# Allegro board base.brd
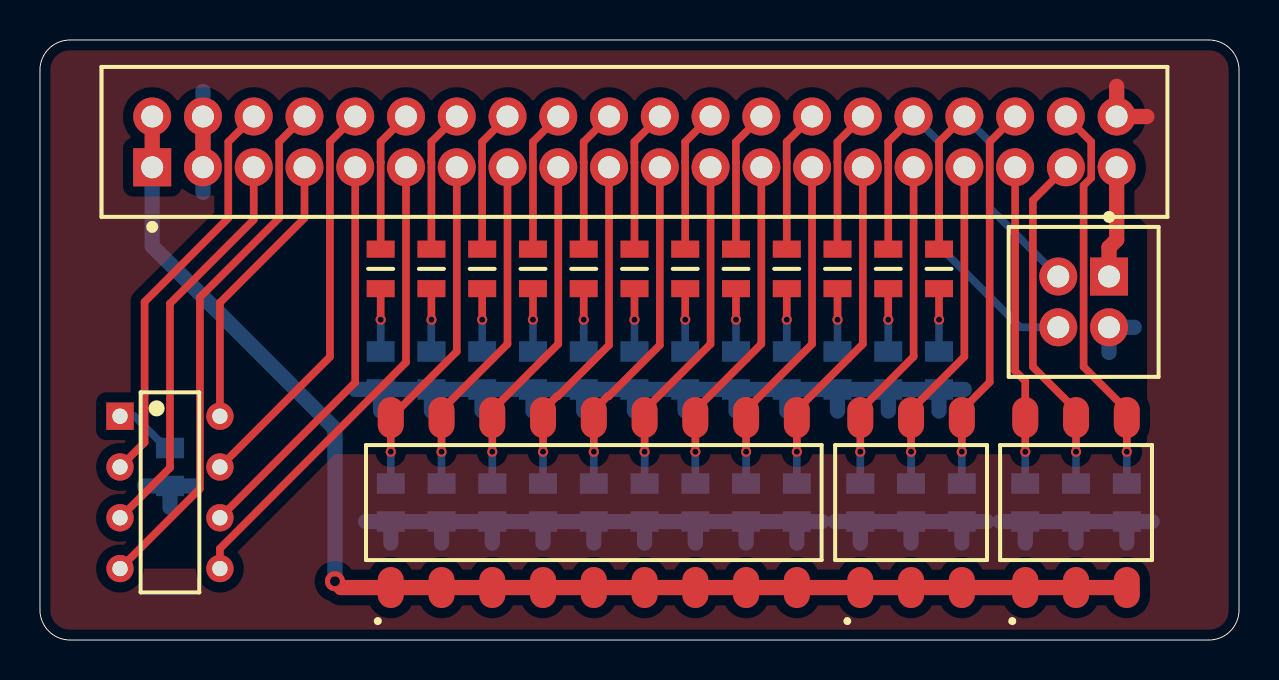
[diagram p0: board, top side]
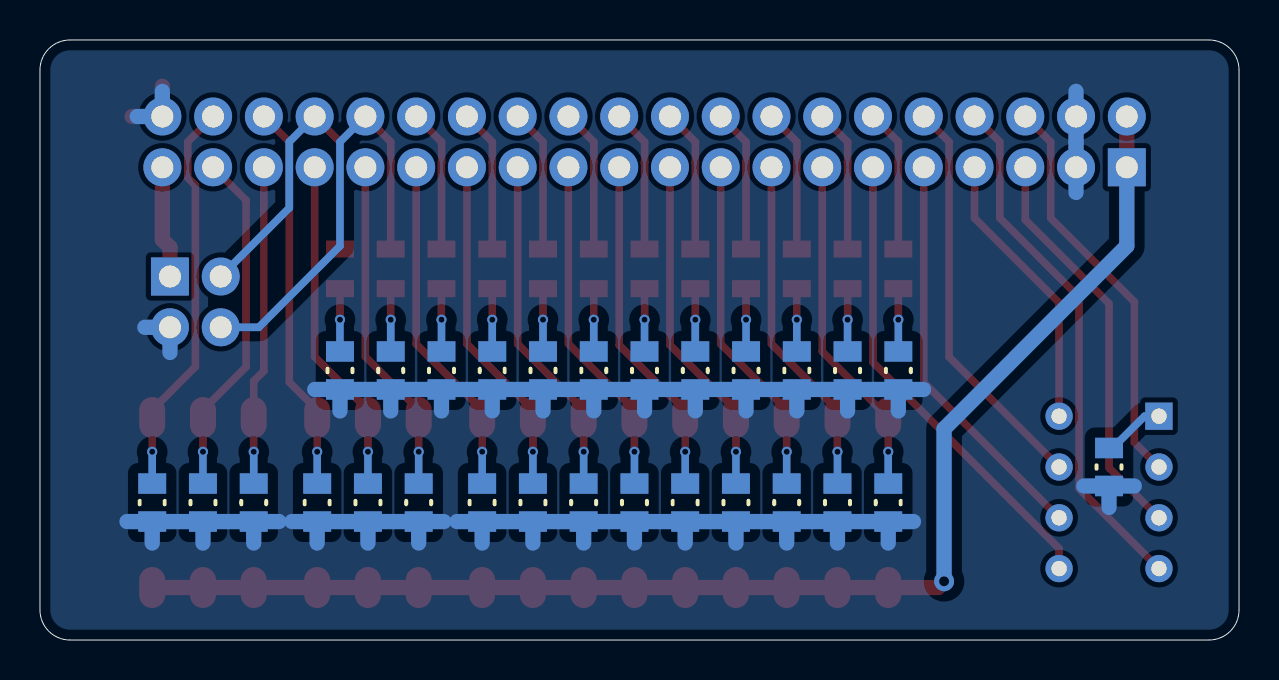
[diagram p1: board, bottom side, seen from below]

Outline 60 x 30 mm; copper layers: TOP, BOTTOM. Coordinates in mm from the lower left corner of the outline.
Outline path: 0,28.5 0,1.5 arc(0.44,0.44) 1.5,0 58.5,0 arc(59.56,0.44) 60,1.5 60,28.5 arc(59.56,29.56) 58.5,30 1.5,30 arc(0.44,29.56) 0,28.5

## Design rules (mm)
constraint set DEFAULT: min track width 0.381
net group PWR: nets VCC VCCIO

## Placement (name value [footprint] x y rotation side)
D1  F5F1  [DIO0805]  17.05 18.56 90 top
D2  F5F1  [DIO0805]  19.59 18.56 90 top
D3  F5F1  [DIO0805]  22.13 18.56 90 top
D4  F5F1  [DIO0805]  24.67 18.56 90 top
D5  F5F1  [DIO0805]  27.21 18.56 90 top
D6  F5F1  [DIO0805]  29.75 18.56 90 top
D7  F5F1  [DIO0805]  32.29 18.56 90 top
D8  F5F1  [DIO0805]  34.83 18.56 90 top
D9  F5F1  [DIO0805]  37.37 18.56 90 top
D10  F5F1  [DIO0805]  39.91 18.56 90 top
D11  F5F1  [DIO0805]  42.45 18.56 90 top
D12  F5F1  [DIO0805]  44.99 18.56 90 top
R1  1k  [RES0805]  17.55 6.87 270 bottom
R2  1k  [RES0805]  20.09 6.87 270 bottom
R3  1k  [RES0805]  22.63 6.87 270 bottom
R4  1k  [RES0805]  25.17 6.87 270 bottom
R5  1k  [RES0805]  27.71 6.87 270 bottom
R6  1k  [RES0805]  30.25 6.87 270 bottom
R7  1k  [RES0805]  32.79 6.87 270 bottom
R8  1k  [RES0805]  35.33 6.87 270 bottom
R9  1k  [RES0805]  37.87 6.87 270 bottom
R10  1k  [RES0805]  41.05 6.87 270 bottom
R11  1k  [RES0805]  43.59 6.87 270 bottom
R12  1k  [RES0805]  46.13 6.87 270 bottom
R13  1k  [RES0805]  49.3 6.87 270 bottom
R14  1k  [RES0805]  51.84 6.87 270 bottom
R15  1k  [RES0805]  54.38 6.87 270 bottom
R16  330  [RES0805]  17.05 13.48 270 bottom
R17  330  [RES0805]  19.59 13.48 270 bottom
R18  330  [RES0805]  22.13 13.48 270 bottom
R19  330  [RES0805]  24.67 13.48 270 bottom
R20  330  [RES0805]  27.21 13.48 270 bottom
R21  330  [RES0805]  29.75 13.48 270 bottom
R22  330  [RES0805]  32.29 13.48 270 bottom
R23  330  [RES0805]  34.83 13.48 270 bottom
R24  330  [RES0805]  37.37 13.48 270 bottom
R25  330  [RES0805]  39.91 13.48 270 bottom
R26  330  [RES0805]  42.45 13.48 270 bottom
R27  330  [RES0805]  44.99 13.48 270 bottom
R28  510  [RES0805]  6.5 8.65 90 bottom
U1  keyarray9  [KEYARRAY9]  27.71 6.87 90 top
U2  keyarray3  [KEYARRAY3]  43.59 6.87 90 top
U3  keyarray3  [KEYARRAY3]  51.84 6.87 90 top
U4  digitaltub  [DIGITALTUB]  6.5 7.38 0 top
U5  PORT  [PIN40]  5.62 23.64 0 top
U6  -  [PIN4]  53.49 18.18 180 top

## Library data of the parts
D1-D12 = F5F1
R1-R28 = R
U1 = keyarray9
U2 U3 = keyarray3
U4 = digitaltub
U5 = PORT
U6 = PIN4

## Footprints (pads in the part's own frame, mm; a bottom-side part is the same pattern mirrored in y, then rotated)
DIGITALTUB
  rect 1.367x1.367 hole 0.765: 1(-2.499,3.81)
  round 1.367 hole 0.765: 2(-2.499,1.27) 3(-2.499,-1.27) 4(-2.499,-3.81) 5(2.499,-3.81) 6(2.499,-1.27) 7(2.499,1.27) 8(2.499,3.81)
DIO0805
  rect 0.851x1.4 smd: 1(-0.988,0) 2(0.988,0)
KEYARRAY3
  oval 2.05x1.3 smd: 1(-4.249,2.54) 2(-4.249,0) 3(-4.249,-2.54) 4(4.249,-2.54) 5(4.249,0) 6(4.249,2.54)
KEYARRAY9
  oval 2.05x1.3 smd: 1(-4.249,10.16) 2(-4.249,7.62) 3(-4.249,5.08) 4(-4.249,2.54) 5(-4.249,0) 6(-4.249,-2.54) 7(-4.249,-5.08) 8(-4.249,-7.62) 9(-4.249,-10.16) 10(4.249,-10.16) 11(4.249,-7.62) 12(4.249,-5.08) 13(4.249,-2.54) 14(4.249,0) 15(4.249,2.54) 16(4.249,5.08) 17(4.249,7.62) 18(4.249,10.16)
PIN4
  rect 1.9x1.9 hole 1.1: 1(0,0)
  round 1.9 hole 1.1: 2(0,2.54) 3(2.54,0) 4(2.54,2.54)
PIN40
  rect 1.9x1.9 hole 1.1: 1(0,0)
  round 1.9 hole 1.1: 2(0,2.54) 3(2.54,0) 4(2.54,2.54) 5(5.08,0) 6(5.08,2.54) 7(7.62,0) 8(7.62,2.54) 9(10.16,0) 10(10.16,2.54) 11(12.7,0) 12(12.7,2.54) 13(15.24,0) 14(15.24,2.54) 15(17.78,0) 16(17.78,2.54) 17(20.32,0) 18(20.32,2.54) 19(22.86,0) 20(22.86,2.54) 21(25.4,0) 22(25.4,2.54) 23(27.94,0) 24(27.94,2.54) 25(30.48,0) 26(30.48,2.54) 27(33.02,0) 28(33.02,2.54) 29(35.56,0) 30(35.56,2.54) 31(38.1,0) 32(38.1,2.54) 33(40.64,0) 34(40.64,2.54) 35(43.18,0) 36(43.18,2.54) 37(45.72,0) 38(45.72,2.54) 39(48.26,0) 40(48.26,2.54)
RES0805
  rect 1.026x1.4 smd: 1(-0.95,0) 2(0.95,0)

## Nets
GND: R1.2 R2.2 R3.2 R4.2 R5.2 R6.2 R7.2 R8.2 R9.2 R10.2 R11.2 R12.2 R13.2 R14.2 R15.2 R16.2 R17.2 R18.2 R19.2 R20.2 R21.2 R22.2 R23.2 R24.2 R25.2 R26.2 R27.2 R28.1 U5.3 U5.4 U5.40 U6.2
VCC: U5.39 U6.1
VCCIO: U1.1 U1.2 U1.3 U1.4 U1.5 U1.6 U1.7 U1.8 U1.9 U2.1 U2.2 U2.3 U3.1 U3.2 U3.3 U5.1 U5.2
DA: U4.8 U5.7
DB: U4.7 U5.10
DC: U4.6 U5.9
DD: U4.5 U5.11
DE: U4.4 U5.8
DF: U4.2 U5.6
DG: U4.3(G) U5.5
K1: R1.1 U1.18 U5.13
K2: R2.1 U1.17 U5.15
K3: R3.1 U1.16 U5.17
K4: R4.1 U1.15 U5.19
K5: R5.1 U1.14 U5.21
K6: R6.1 U1.13 U5.23
K7: R7.1 U1.12 U5.25
K8: R8.1 U1.11 U5.27
K9: R9.1 U1.10 U5.29
K10: R10.1 U2.6 U5.31
K11: R11.1 U2.5 U5.33
K12: R12.1 U2.4 U5.36
K13: R13.1 U3.6 U5.35
K14: R14.1 U3.5 U5.37
K15: R15.1 U3.4 U5.38
L1: D1.2 U5.12
L2: D2.2 U5.14
L3: D3.2 U5.16
L4: D4.2 U5.18
L5: D5.2 U5.20
L6: D6.2 U5.22
L7: D7.2 U5.24
L8: D8.2 U5.26
L9: D9.2 U5.28
L10: D10.2 U5.30
L11: D11.2 U5.32 U6.4
L12: D12.2 U5.34 U6.3
N04054: R28.2 U4.1
N04979: D1.1(CATHODE) R16.1
N05029: D2.1(CATHODE) R17.1
N05079: D3.1(CATHODE) R18.1
N05129: D4.1(CATHODE) R19.1
N05179: D5.1(CATHODE) R20.1
N05229: D6.1(CATHODE) R21.1
N05279: D7.1(CATHODE) R22.1
N05329: D8.1(CATHODE) R23.1
N05379: D9.1(CATHODE) R24.1
N09942: D10.1(CATHODE) R25.1
N09976: D11.1(CATHODE) R26.1
N12519: D12.1(CATHODE) R27.1

## Via types
v1: diameter 0.508, hole 0.305, TOP to BOTTOM, 27 vias
v2: diameter 1.001, hole 0.5, TOP to BOTTOM, 1 via

## Routing (per net, layer and track width the routed paths; a pad name or vN(x,y) marks a point on that pad's centre or on a via; arc(x,y) is an arc through that point)
GND: length 116.4
  TOP w0.762: 53.88,27.69 U5.40 55.39,26.18 ; U5.4 U5.3
  BOTTOM w0.762: 25.95,12.53 R20.2 ; R20.2 27.21,11.45 ; R20.2 28.47,12.53 ; 17.55,4.85 R1.2 ; R1.2 18.82,5.92 ; R1.2 16.29,5.92 ; 32.29,11.45 R22.2 ; R22.2 31.03,12.53 ; R22.2 33.55,12.53 ; R25.2 41.17,12.53 ; R25.2 38.65,12.53 ; R25.2 39.91,11.45 ; 20.09,4.85 R2.2 ; R2.2 18.83,5.92 ; R2.2 21.36,5.92 ; 8.16,24.89 U5.3 8.16,22.38 ; R17.2 20.85,12.53 ; R17.2 18.33,12.53 ; R17.2 19.59,11.45 ; 5.24,7.7 R28.1 ; R28.1 6.5,6.63 ; R28.1 7.77,7.7 ; R8.2 36.6,5.92 ; R8.2 35.33,4.85 ; R8.2 34.07,5.92 ; 43.73,12.53 R27.2 ; R27.2 46.25,12.53 ; R27.2 44.99,11.45 ; 23.41,12.53 R19.2 ; R19.2 24.67,11.45 ; R19.2 25.93,12.53 ; 33.57,12.53 R23.2 ; R23.2 36.09,12.53 ; R23.2 34.83,11.45 ; 41.05,4.85 R10.2 ; R10.2 39.79,5.92 ; R10.2 42.31,5.92 ; 8.16,27.43 U5.4 8.16,24.92 ; R12.2 47.39,5.92 ; R12.2 44.87,5.92 ; R12.2 46.13,4.85 ; 37.37,11.45 R24.2 ; R24.2 38.63,12.53 ; R24.2 36.11,12.53 ; R11.2 44.85,5.92 ; R11.2 43.59,4.85 ; R11.2 42.33,5.92 ; 53.12,5.92 R15.2 ; R15.2 55.65,5.92 ; R15.2 54.38,4.85 ; 20.87,12.53 R18.2 ; R18.2 23.39,12.53 ; R18.2 22.13,11.45 ; R6.2 31.52,5.92 ; R6.2 30.25,4.85 ; R6.2 28.99,5.92 ; 21.37,5.92 R3.2 ; R3.2 22.63,4.85 ; R3.2 23.9,5.92 ; R13.2 50.57,5.92 ; R13.2 48.04,5.92 ; R13.2 49.3,4.85 ; 25.17,4.85 R4.2 ; R4.2 23.91,5.92 ; R4.2 26.44,5.92 ; R21.2 31.01,12.53 ; R21.2 29.75,11.45 ; R21.2 28.49,12.53 ; 54.75,15.64 53.49,15.64 53.49,14.38 ; R14.2 53.11,5.92 ; R14.2 50.58,5.92 ; R14.2 51.84,4.85 ; 37.87,4.85 R9.2 ; R9.2 39.14,5.92 ; R9.2 36.61,5.92 ; R26.2 43.71,12.53 ; R26.2 41.19,12.53 ; R26.2 42.45,11.45 ; R16.2 18.31,12.53 ; R16.2 15.79,12.53 ; R16.2 17.05,11.45 ; 55.13,26.18 U5.40 53.88,27.43 ; 32.79,4.85 R7.2 ; R7.2 31.53,5.92 ; R7.2 34.06,5.92 ; 26.45,5.92 R5.2 ; R5.2 27.71,4.85 ; R5.2 28.98,5.92
VCC: length 5.6
  TOP w0.762: U5.39 53.88,20.02 53.49,19.63 U6.1
VCCIO: length 66.8
  TOP w0.762: v2(14.76,2.94) 15.07,2.62 U1.1 U1.2 U1.3 U1.4 U1.5 U1.6 U1.7 U1.8 U1.9 U2.1 U2.2 U2.3 U3.1 U3.2 U3.3 ; U5.2 U5.1
  BOTTOM w0.762: U5.1 5.62,19.7 14.76,10.56 v2(14.76,2.94)
DA: length 14.2
  TOP w0.381: U4.8 9,16.87 13.24,21.1 U5.7
DB: length 20.3
  TOP w0.381: U5.10 14.51,24.91 14.51,14.16 U4.7
DC: length 20.3
  TOP w0.381: U4.6 15.78,12.88 U5.9
DD: length 23.9
  TOP w0.381: U4.5 9,4.57 18.32,13.88 U5.11
DE: length 26.4
  TOP w0.381: U4.4 8,7.57 8,17.13 11.97,21.1 11.97,24.91 U5.8
DF: length 20.3
  TOP w0.381: U4.2 5.23,9.88 5.23,16.91 9.42,21.09 9.42,24.9 U5.6
DG: length 20.3
  TOP w0.381: U4.3 6.5,8.61 6.5,16.82 10.7,21.01 U5.5
K1: length 17.2
  TOP w0.381: v1(17.55,9.41) U1.18 20.86,14.42 U5.13
  BOTTOM w0.381: v1(17.55,9.41) R1.1
K2: length 17.2
  TOP w0.381: v1(20.09,9.41) U1.17 20.09,11.5 23.4,14.8 U5.15
  BOTTOM w0.381: v1(20.09,9.41) R2.1
K3: length 17.2
  TOP w0.381: v1(22.63,9.41) U1.16 22.63,11.5 25.94,14.8 U5.17
  BOTTOM w0.381: v1(22.63,9.41) R3.1
K4: length 17.2
  TOP w0.381: U5.19 28.48,14.75 25.92,12.19 25.86,12.19 25.17,11.5 U1.15 v1(25.17,9.41)
  BOTTOM w0.381: v1(25.17,9.41) R4.1
K5: length 17.2
  TOP w0.381: U5.21 31.02,14.74 28.46,12.19 28.4,12.19 27.71,11.5 U1.14 v1(27.71,9.41)
  BOTTOM w0.381: v1(27.71,9.41) R5.1
K6: length 17.2
  TOP w0.381: v1(30.25,9.41) U1.13 30.25,11.5 33.56,14.8 U5.23
  BOTTOM w0.381: v1(30.25,9.41) R6.1
K7: length 17.2
  TOP w0.381: U5.25 36.1,14.8 32.79,11.5 U1.12 v1(32.79,9.41)
  BOTTOM w0.381: v1(32.79,9.41) R7.1
K8: length 17.2
  TOP w0.381: U5.27 38.64,14.8 35.33,11.5 U1.11 v1(35.33,9.41)
  BOTTOM w0.381: v1(35.33,9.41) R8.1
K9: length 17.2
  TOP w0.381: v1(37.87,9.41) U1.10 37.87,11.5 41.18,14.8 U5.29
  BOTTOM w0.381: v1(37.87,9.41) R9.1
K10: length 16.9
  TOP w0.381: v1(41.05,9.41) U2.6 41.05,11.5 43.72,14.17 U5.31
  BOTTOM w0.381: v1(41.05,9.41) R10.1
K11: length 16.9
  TOP w0.381: U5.33 46.26,14.17 43.59,11.5 U2.5 v1(43.59,9.41)
  BOTTOM w0.381: v1(43.59,9.41) R11.1
K12: length 19.5
  TOP w0.381: v1(46.13,9.41) U2.4 46.13,11.5 47.52,12.89 47.52,24.9 U5.36
  BOTTOM w0.381: v1(46.13,9.41) R12.1
K13: length 16
  TOP w0.381: v1(49.3,9.41) U3.6 49.3,12.94 48.8,13.45 U5.35
  BOTTOM w0.381: v1(49.3,9.41) R13.1
K14: length 17.4
  TOP w0.381: U5.37 49.68,21.99 49.68,13.66 51.84,11.5 U3.5 v1(51.84,9.41)
  BOTTOM w0.381: v1(51.84,9.41) R14.1
K15: length 19.9
  TOP w0.381: U5.38 52.6,24.91 52.6,23.11 52.22,22.73 52.22,13.66 54.38,11.5 U3.4 v1(54.38,9.41)
  BOTTOM w0.381: v1(54.38,9.41) R15.1
L1: length 7.2
  TOP w0.381: U5.12 17.04,24.9 17.04,23.89 17.05,23.89 D1.2
L2: length 7.2
  TOP w0.381: U5.14 19.58,24.9 19.58,23.89 19.59,23.89 D2.2
L3: length 7.2
  TOP w0.381: D3.2 22.13,23.89 22.12,23.89 22.12,24.9 U5.16
L4: length 7.2
  TOP w0.381: D4.2 24.67,23.89 24.66,23.89 24.66,24.9 U5.18
L5: length 7.2
  TOP w0.381: D5.2 27.21,23.89 27.2,23.89 27.2,24.9 U5.20
L6: length 7.2
  TOP w0.381: U5.22 29.74,24.9 29.74,23.89 29.75,23.89 D6.2
L7: length 7.2
  TOP w0.381: U5.24 32.28,24.9 32.28,23.89 32.29,23.89 D7.2
L8: length 7.2
  TOP w0.381: D8.2 34.83,23.89 34.82,23.89 34.82,24.9 U5.26
L9: length 7.2
  TOP w0.381: U5.28 37.36,24.9 37.36,23.89 37.37,23.89 D9.2
L10: length 7.2
  TOP w0.381: D10.2 39.91,23.89 39.9,23.89 39.9,24.9 U5.30
L11: length 21.8
  TOP w0.381: D11.2 42.45,23.89 42.44,23.89 42.44,24.9 U5.32
  BOTTOM w0.381: U6.4 49.05,15.64 44.99,19.7 44.99,24.9 U5.32
L12: length 17.1
  TOP w0.381: D12.2 44.99,23.89 44.98,23.89 44.98,24.9 U5.34
  BOTTOM w0.381: U5.34 47.52,24.91 47.52,21.61 U6.3
N04054: length 3.2
  BOTTOM w0.381: U4.1 4.73,11.19 6.32,9.6 R28.2
N04979: length 3.1
  TOP w0.381: D1.1 v1(17.05,16.02)
  BOTTOM w0.381: v1(17.05,16.02) R16.1
N05029: length 3.1
  TOP w0.381: D2.1 v1(19.59,16.02)
  BOTTOM w0.381: v1(19.59,16.02) R17.1
N05079: length 3.1
  TOP w0.381: D3.1 v1(22.13,16.02)
  BOTTOM w0.381: v1(22.13,16.02) R18.1
N05129: length 3.1
  TOP w0.381: D4.1 v1(24.67,16.02)
  BOTTOM w0.381: v1(24.67,16.02) R19.1
N05179: length 3.1
  TOP w0.381: D5.1 v1(27.21,16.02)
  BOTTOM w0.381: v1(27.21,16.02) R20.1
N05229: length 3.1
  TOP w0.381: D6.1 v1(29.75,16.02)
  BOTTOM w0.381: v1(29.75,16.02) R21.1
N05279: length 3.1
  TOP w0.381: D7.1 v1(32.29,16.02)
  BOTTOM w0.381: v1(32.29,16.02) R22.1
N05329: length 3.1
  TOP w0.381: D8.1 v1(34.83,16.02)
  BOTTOM w0.381: v1(34.83,16.02) R23.1
N05379: length 3.1
  TOP w0.381: D9.1 v1(37.37,16.02)
  BOTTOM w0.381: v1(37.37,16.02) R24.1
N09942: length 3.1
  TOP w0.381: D10.1 v1(39.91,16.02)
  BOTTOM w0.381: v1(39.91,16.02) R25.1
N09976: length 3.1
  TOP w0.381: D11.1 v1(42.45,16.02)
  BOTTOM w0.381: v1(42.45,16.02) R26.1
N12519: length 3.1
  TOP w0.381: D12.1 v1(44.99,16.02)
  BOTTOM w0.381: v1(44.99,16.02) R27.1

## Copper pours and planes (outline as drawn; the poured copper is in the pictures)
GND on TOP: 0.52,28.5 0.81,29.2 1.5,29.48 58.5,29.48 59.19,29.2 59.48,28.5 59.48,1.5 59.19,0.81 58.5,0.52 1.5,0.52 0.81,0.81 0.52,1.5 ; 1 cut-out
GND on BOTTOM: 0.52,28.5 0.81,29.2 1.5,29.48 58.5,29.48 59.19,29.2 59.48,28.5 59.48,1.5 59.19,0.81 58.5,0.52 1.5,0.52 0.81,0.81 0.52,1.5 ; 1 cut-out

## Text on the board
DEVICE_TYPE_BOTTOM: FIGURE | FINISHED_SIZE | 12.0 | 19.7 | 30.1 | 43.3 | DRILL CHART: TOP to BOTTOM | ALL UNITS ARE IN MILS | TOLERANCE_DRILL | +2.0/-2.0 | +3.9/-3.9 | +5.0/-5.0 | PLATED | QTY | 27 | 1 | 8 | 44
